# EAGLE board keyswitch_noRoutes (EAGLE 8.1.1)

Size 235.41 x 76.19 mm. Coordinates in mm from the lower left corner, seen from the top.
Outline: 0,0 235.41,0 235.41,76.19 0,76.19 0,0
Copper layers (1*16): Top 0.035mm / dielectric 1.5mm / Bottom 0.035mm
Design rules "default": minimum track width 10mil, minimum drill 24mil, track to track 8mil, track to pad 8mil, pad to pad 8mil, via to via 8mil, smd to smd 8mil, copper to edge 40mil, drill to drill 8mil, minimum pad ring 10mil, minimum via ring 8mil, stop-mask expansion 4mil, vias tented up to drill 0mil, thermal gap 10mil
Net classes: 0 default: clearance 0.205 mm

## Footprints (pad centres in the part's own frame; a part is rotated, then mirrored left to right if it is on the bottom)
FEATHERWING_DIM = drill 1 pad 1.778: 1 6.35,1.27; 2 8.89,1.27; 3 11.43,1.27; 4 13.97,1.27; 5 16.51,1.27; 6 19.05,1.27; 7 21.59,1.27; 8 24.13,1.27; 9 26.67,1.27; 10 29.21,1.27; 11 31.75,1.27; 12 34.29,1.27; 13 36.83,1.27; 14 39.37,1.27; 15 41.91,1.27; 16 44.45,1.27; 17 44.45,21.59; 18 41.91,21.59; 19 39.37,21.59; 20 36.83,21.59; 21 34.29,21.59; 22 31.75,21.59; 23 29.21,21.59; 24 26.67,21.59; 25 24.13,21.59; 26 21.59,21.59; 27 19.05,21.59; 28 16.51,21.59 | drill 2.5 pad 3.81: P$1 2.54,20.32; P$2 2.54,2.54 | hole 2.54: 48.26,20.32; 48.26,2.54
MX-1U-DIODE = drill 1 pad 2: D+ -3.81,-5.08 | drill 1 pad 2 square: D- 3.81,-5.08 | drill 1.3 pad 2.54: MX1 -3.81,2.54; MX2 2.54,5.08 | hole 4: 0,0 | hole 1.7: -5.08,0; 5.08,0

## Placement (x,y rotation side)
FEATHER  FEATHERWING_NODIM  [FEATHERWING_DIM]  234.95,59.53 180 top
KEY_A  KEYSWITCH-DIODE-MX-1U-DIODE  [MX-1U-DIODE]  35.72,48.42 0 top
KEY_APOST  KEYSWITCH-DIODE-MX-1U-DIODE  [MX-1U-DIODE]  226.22,48.42 0 top
KEY_B  KEYSWITCH-DIODE-MX-1U-DIODE  [MX-1U-DIODE]  121.44,29.37 0 top
KEY_BKSPCE  KEYSWITCH-DIODE-MX-1U-DIODE  [MX-1U-DIODE]  223.84,67.47 0 top
KEY_C  KEYSWITCH-DIODE-MX-1U-DIODE  [MX-1U-DIODE]  83.34,29.37 0 top
KEY_COMMA  KEYSWITCH-DIODE-MX-1U-DIODE  [MX-1U-DIODE]  178.59,29.37 0 top
KEY_D  KEYSWITCH-DIODE-MX-1U-DIODE  [MX-1U-DIODE]  73.82,48.42 0 top
KEY_E  KEYSWITCH-DIODE-MX-1U-DIODE  [MX-1U-DIODE]  69.06,67.47 0 top
KEY_ENTER  KEYSWITCH-DIODE-MX-1U-DIODE  [MX-1U-DIODE]  223.84,10.32 0 top
KEY_ESC  KEYSWITCH-DIODE-MX-1U-DIODE  [MX-1U-DIODE]  9.53,67.47 0 top
KEY_F  KEYSWITCH-DIODE-MX-1U-DIODE  [MX-1U-DIODE]  92.87,48.42 0 top
KEY_FN1  KEYSWITCH-DIODE-MX-1U-DIODE  [MX-1U-DIODE]  85.73,10.32 0 top
KEY_FN2  KEYSWITCH-DIODE-MX-1U-DIODE  [MX-1U-DIODE]  176.21,10.32 0 top
KEY_FN3  KEYSWITCH-DIODE-MX-1U-DIODE  [MX-1U-DIODE]  202.41,10.32 0 top
KEY_G  KEYSWITCH-DIODE-MX-1U-DIODE  [MX-1U-DIODE]  111.92,48.42 0 top
KEY_H  KEYSWITCH-DIODE-MX-1U-DIODE  [MX-1U-DIODE]  130.97,48.42 0 top
KEY_I  KEYSWITCH-DIODE-MX-1U-DIODE  [MX-1U-DIODE]  164.31,67.47 0 top
KEY_J  KEYSWITCH-DIODE-MX-1U-DIODE  [MX-1U-DIODE]  150.02,48.42 0 top
KEY_K  KEYSWITCH-DIODE-MX-1U-DIODE  [MX-1U-DIODE]  169.07,48.42 0 top
KEY_L  KEYSWITCH-DIODE-MX-1U-DIODE  [MX-1U-DIODE]  188.12,48.42 0 top
KEY_L_ALT  KEYSWITCH-DIODE-MX-1U-DIODE  [MX-1U-DIODE]  52.39,10.32 0 top
KEY_L_CTRL  KEYSWITCH-DIODE-MX-1U-DIODE  [MX-1U-DIODE]  9.53,10.32 0 top
KEY_L_SHIFT  KEYSWITCH-DIODE-MX-1U-DIODE  [MX-1U-DIODE]  16.67,29.37 0 top
KEY_M  KEYSWITCH-DIODE-MX-1U-DIODE  [MX-1U-DIODE]  159.54,29.37 0 top
KEY_N  KEYSWITCH-DIODE-MX-1U-DIODE  [MX-1U-DIODE]  140.49,29.37 0 top
KEY_O  KEYSWITCH-DIODE-MX-1U-DIODE  [MX-1U-DIODE]  183.36,67.47 0 top
KEY_P  KEYSWITCH-DIODE-MX-1U-DIODE  [MX-1U-DIODE]  202.41,67.47 0 top
KEY_PERIOD  KEYSWITCH-DIODE-MX-1U-DIODE  [MX-1U-DIODE]  197.64,29.37 0 top
KEY_Q  KEYSWITCH-DIODE-MX-1U-DIODE  [MX-1U-DIODE]  30.96,67.47 0 top
KEY_R  KEYSWITCH-DIODE-MX-1U-DIODE  [MX-1U-DIODE]  88.11,67.47 0 top
KEY_R_SHIFT  KEYSWITCH-DIODE-MX-1U-DIODE  [MX-1U-DIODE]  221.46,29.37 0 top
KEY_S  KEYSWITCH-DIODE-MX-1U-DIODE  [MX-1U-DIODE]  54.77,48.42 0 top
KEY_S_COLON  KEYSWITCH-DIODE-MX-1U-DIODE  [MX-1U-DIODE]  207.17,48.42 0 top
KEY_SPACE  KEYSWITCH-DIODE-MX-1U-DIODE  [MX-1U-DIODE]  133.35,10.32 0 top
KEY_T  KEYSWITCH-DIODE-MX-1U-DIODE  [MX-1U-DIODE]  107.16,67.47 0 top
KEY_TAB  KEYSWITCH-DIODE-MX-1U-DIODE  [MX-1U-DIODE]  11.91,48.42 0 top
KEY_U  KEYSWITCH-DIODE-MX-1U-DIODE  [MX-1U-DIODE]  145.26,67.47 0 top
KEY_V  KEYSWITCH-DIODE-MX-1U-DIODE  [MX-1U-DIODE]  101.6,29.37 0 top
KEY_W  KEYSWITCH-DIODE-MX-1U-DIODE  [MX-1U-DIODE]  50.01,67.47 0 top
KEY_WIN  KEYSWITCH-DIODE-MX-1U-DIODE  [MX-1U-DIODE]  30.96,10.32 0 top
KEY_X  KEYSWITCH-DIODE-MX-1U-DIODE  [MX-1U-DIODE]  64.29,29.37 0 top
KEY_Y  KEYSWITCH-DIODE-MX-1U-DIODE  [MX-1U-DIODE]  126.21,67.47 0 top
KEY_Z  KEYSWITCH-DIODE-MX-1U-DIODE  [MX-1U-DIODE]  45.24,29.37 0 top

## Library data of the parts
FEATHER = adafruit
KEY_A KEY_APOST KEY_B KEY_BKSPCE KEY_C KEY_COMMA KEY_D KEY_E KEY_ENTER KEY_ESC KEY_F KEY_FN1-KEY_FN3 KEY_G KEY_H KEY_I KEY_J KEY_K KEY_L KEY_L_ALT KEY_L_CTRL KEY_L_SHIFT KEY_M KEY_N KEY_O KEY_P KEY_PERIOD KEY_Q KEY_R KEY_R_SHIFT KEY_S KEY_S_COLON KEY_SPACE KEY_T KEY_TAB KEY_U KEY_V KEY_W KEY_WIN KEY_X KEY_Y KEY_Z = Keyboard

## Nets
GND: FEATHER.1 FEATHER.4
N$1: KEY_ESC.D+ KEY_ESC.MX1
N$2: KEY_Q.D+ KEY_Q.MX1
N$3: KEY_W.D+ KEY_W.MX1
N$4: KEY_E.D+ KEY_E.MX1
N$5: KEY_R.D+ KEY_R.MX1
N$6: KEY_T.D+ KEY_T.MX1
N$7: KEY_Y.D+ KEY_Y.MX1
N$8: KEY_U.D+ KEY_U.MX1
N$9: KEY_I.D+ KEY_I.MX1
N$10: KEY_O.D+ KEY_O.MX1
N$11: KEY_P.D+ KEY_P.MX1
N$12: KEY_BKSPCE.D+ KEY_BKSPCE.MX1
N$13: KEY_TAB.D+ KEY_TAB.MX1
N$14: KEY_A.D+ KEY_A.MX1
N$15: KEY_S.D+ KEY_S.MX1
N$16: KEY_D.D+ KEY_D.MX1
N$17: KEY_F.D+ KEY_F.MX1
N$18: KEY_G.D+ KEY_G.MX1
N$19: KEY_H.D+ KEY_H.MX1
N$20: KEY_J.D+ KEY_J.MX1
N$21: KEY_K.D+ KEY_K.MX1
N$22: KEY_L.D+ KEY_L.MX1
N$23: KEY_S_COLON.D+ KEY_S_COLON.MX1
N$24: KEY_APOST.D+ KEY_APOST.MX1
N$25: KEY_L_SHIFT.D+ KEY_L_SHIFT.MX1
N$26: KEY_Z.D+ KEY_Z.MX1
N$27: KEY_X.D+ KEY_X.MX1
N$28: KEY_C.D+ KEY_C.MX1
N$29: KEY_V.D+ KEY_V.MX1
N$30: KEY_B.D+ KEY_B.MX1
N$31: KEY_N.D+ KEY_N.MX1
N$32: KEY_M.D+ KEY_M.MX1
N$33: KEY_COMMA.D+ KEY_COMMA.MX1
N$34: KEY_PERIOD.D+ KEY_PERIOD.MX1
N$35: FEATHER.9 KEY_C.MX2 KEY_D.MX2 KEY_E.MX2 KEY_FN1.MX2
N$36: KEY_R_SHIFT.D+ KEY_R_SHIFT.MX1
N$37: KEY_WIN.D+ KEY_WIN.MX1
N$38: KEY_L_ALT.D+ KEY_L_ALT.MX1
N$39: KEY_FN1.D+ KEY_FN1.MX1
N$41: KEY_SPACE.D+ KEY_SPACE.MX1
N$42: FEATHER.14 KEY_A.MX2 KEY_Q.MX2 KEY_WIN.MX2 KEY_Z.MX2
N$43: FEATHER.10 KEY_L_ALT.MX2 KEY_S.MX2 KEY_W.MX2 KEY_X.MX2
N$44: KEY_FN2.D+ KEY_FN2.MX1
N$45: KEY_FN3.D+ KEY_FN3.MX1
N$46: FEATHER.22 KEY_B.MX2 KEY_G.MX2 KEY_SPACE.MX2 KEY_T.MX2
N$47: KEY_ENTER.D+ KEY_ENTER.MX1
N$49: FEATHER.8 KEY_F.MX2 KEY_R.MX2 KEY_V.MX2
N$50: FEATHER.24 KEY_ENTER.D- KEY_FN1.D- KEY_FN2.D- KEY_FN3.D- KEY_L_ALT.D- KEY_L_CTRL.D- KEY_SPACE.D- KEY_WIN.D-
N$51: FEATHER.17 KEY_H.MX2 KEY_N.MX2 KEY_Y.MX2
N$52: FEATHER.21 KEY_FN3.MX2 KEY_L.MX2 KEY_O.MX2 KEY_PERIOD.MX2
N$53: FEATHER.20 KEY_COMMA.MX2 KEY_FN2.MX2 KEY_I.MX2 KEY_K.MX2
N$54: FEATHER.18 KEY_J.MX2 KEY_M.MX2 KEY_U.MX2
N$55: FEATHER.7 KEY_P.MX2 KEY_S_COLON.MX2
N$56: FEATHER.25 KEY_APOST.MX2 KEY_BKSPCE.MX2 KEY_ENTER.MX2 KEY_R_SHIFT.MX2
N$57: FEATHER.6 KEY_BKSPCE.D- KEY_E.D- KEY_ESC.D- KEY_I.D- KEY_O.D- KEY_P.D- KEY_Q.D- KEY_R.D- KEY_T.D- KEY_U.D- KEY_W.D- KEY_Y.D-
N$58: FEATHER.15 KEY_ESC.MX2 KEY_L_CTRL.MX2 KEY_L_SHIFT.MX2 KEY_TAB.MX2
N$59: FEATHER.23 KEY_B.D- KEY_C.D- KEY_COMMA.D- KEY_L_SHIFT.D- KEY_M.D- KEY_N.D- KEY_PERIOD.D- KEY_R_SHIFT.D- KEY_V.D- KEY_X.D- KEY_Z.D-
N$60: KEY_L_CTRL.D+ KEY_L_CTRL.MX1
N$72: FEATHER.5 KEY_A.D- KEY_APOST.D- KEY_D.D- KEY_F.D- KEY_G.D- KEY_H.D- KEY_J.D- KEY_K.D- KEY_L.D- KEY_S.D- KEY_S_COLON.D- KEY_TAB.D-

## Tracks (layer width: path | path; a pad name or v marks a point on that pad's centre or on a via)
GND  (1 unrouted)
N$1  (1 unrouted)
N$2  (1 unrouted)
N$3  (1 unrouted)
N$4  (1 unrouted)
N$5  (1 unrouted)
N$6  (1 unrouted)
N$7  (1 unrouted)
N$8  (1 unrouted)
N$9  (1 unrouted)
N$10  (1 unrouted)
N$11  (1 unrouted)
N$12  (1 unrouted)
N$13  (1 unrouted)
N$14  (1 unrouted)
N$15  (1 unrouted)
N$16  (1 unrouted)
N$17  (1 unrouted)
N$18  (1 unrouted)
N$19  (1 unrouted)
N$20  (1 unrouted)
N$21  (1 unrouted)
N$22  (1 unrouted)
N$23  (1 unrouted)
N$24  (1 unrouted)
N$25  (1 unrouted)
N$26  (1 unrouted)
N$27  (1 unrouted)
N$28  (1 unrouted)
N$29  (1 unrouted)
N$30  (1 unrouted)
N$31  (1 unrouted)
N$32  (1 unrouted)
N$33  (1 unrouted)
N$34  (1 unrouted)
N$35  (4 unrouted)
N$36  (1 unrouted)
N$37  (1 unrouted)
N$38  (1 unrouted)
N$39  (1 unrouted)
N$41  (1 unrouted)
N$42  (4 unrouted)
N$43  (4 unrouted)
N$44  (1 unrouted)
N$45  (1 unrouted)
N$46  (4 unrouted)
N$47  (1 unrouted)
N$49  (3 unrouted)
N$50  (8 unrouted)
N$51  (3 unrouted)
N$52  (4 unrouted)
N$53  (4 unrouted)
N$54  (3 unrouted)
N$55  (2 unrouted)
N$56  (4 unrouted)
N$57  (12 unrouted)
N$58  (4 unrouted)
N$59  (11 unrouted)
N$60  (1 unrouted)
N$72  (12 unrouted)